# Altium PCB MEA_60_6MIL.PcbDoc
Units mil, origin at the board's own origin, x right, y up, seen from the top; angles counter-clockwise.
Board outline 1929.13 x 1929.13 mil, 4 copper layers (Top Copper Layer, Internal Copper Layer 1, Internal Copper Layer 2, Bottom Copper Layer), stack 62.205 mil thick; 1 components, 60 nets, 120 pads, 13 vias.
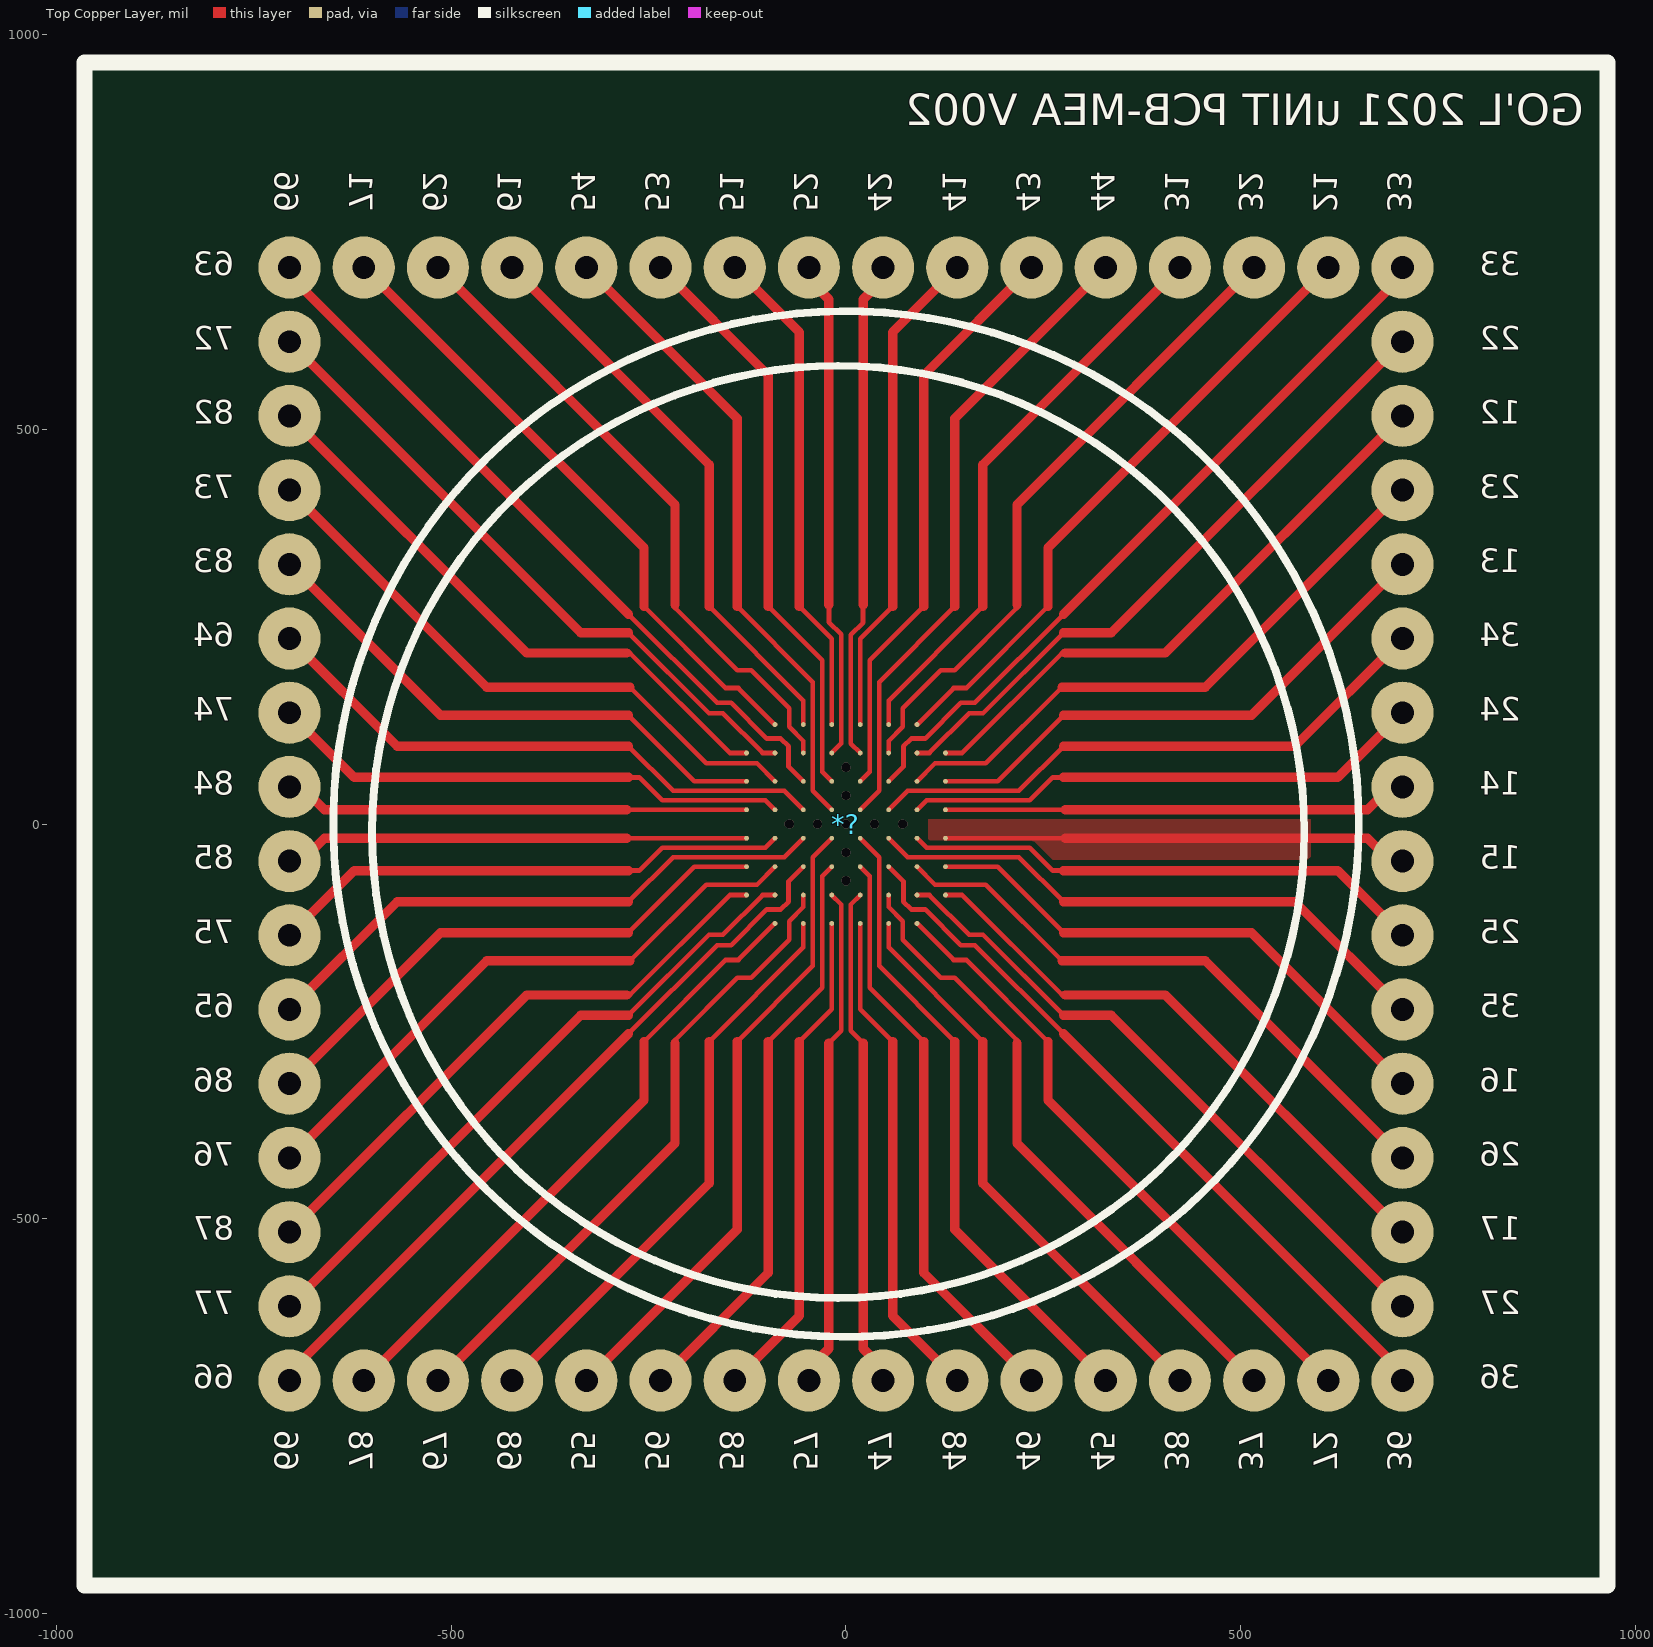
[diagram p0: Top Copper Layer view]
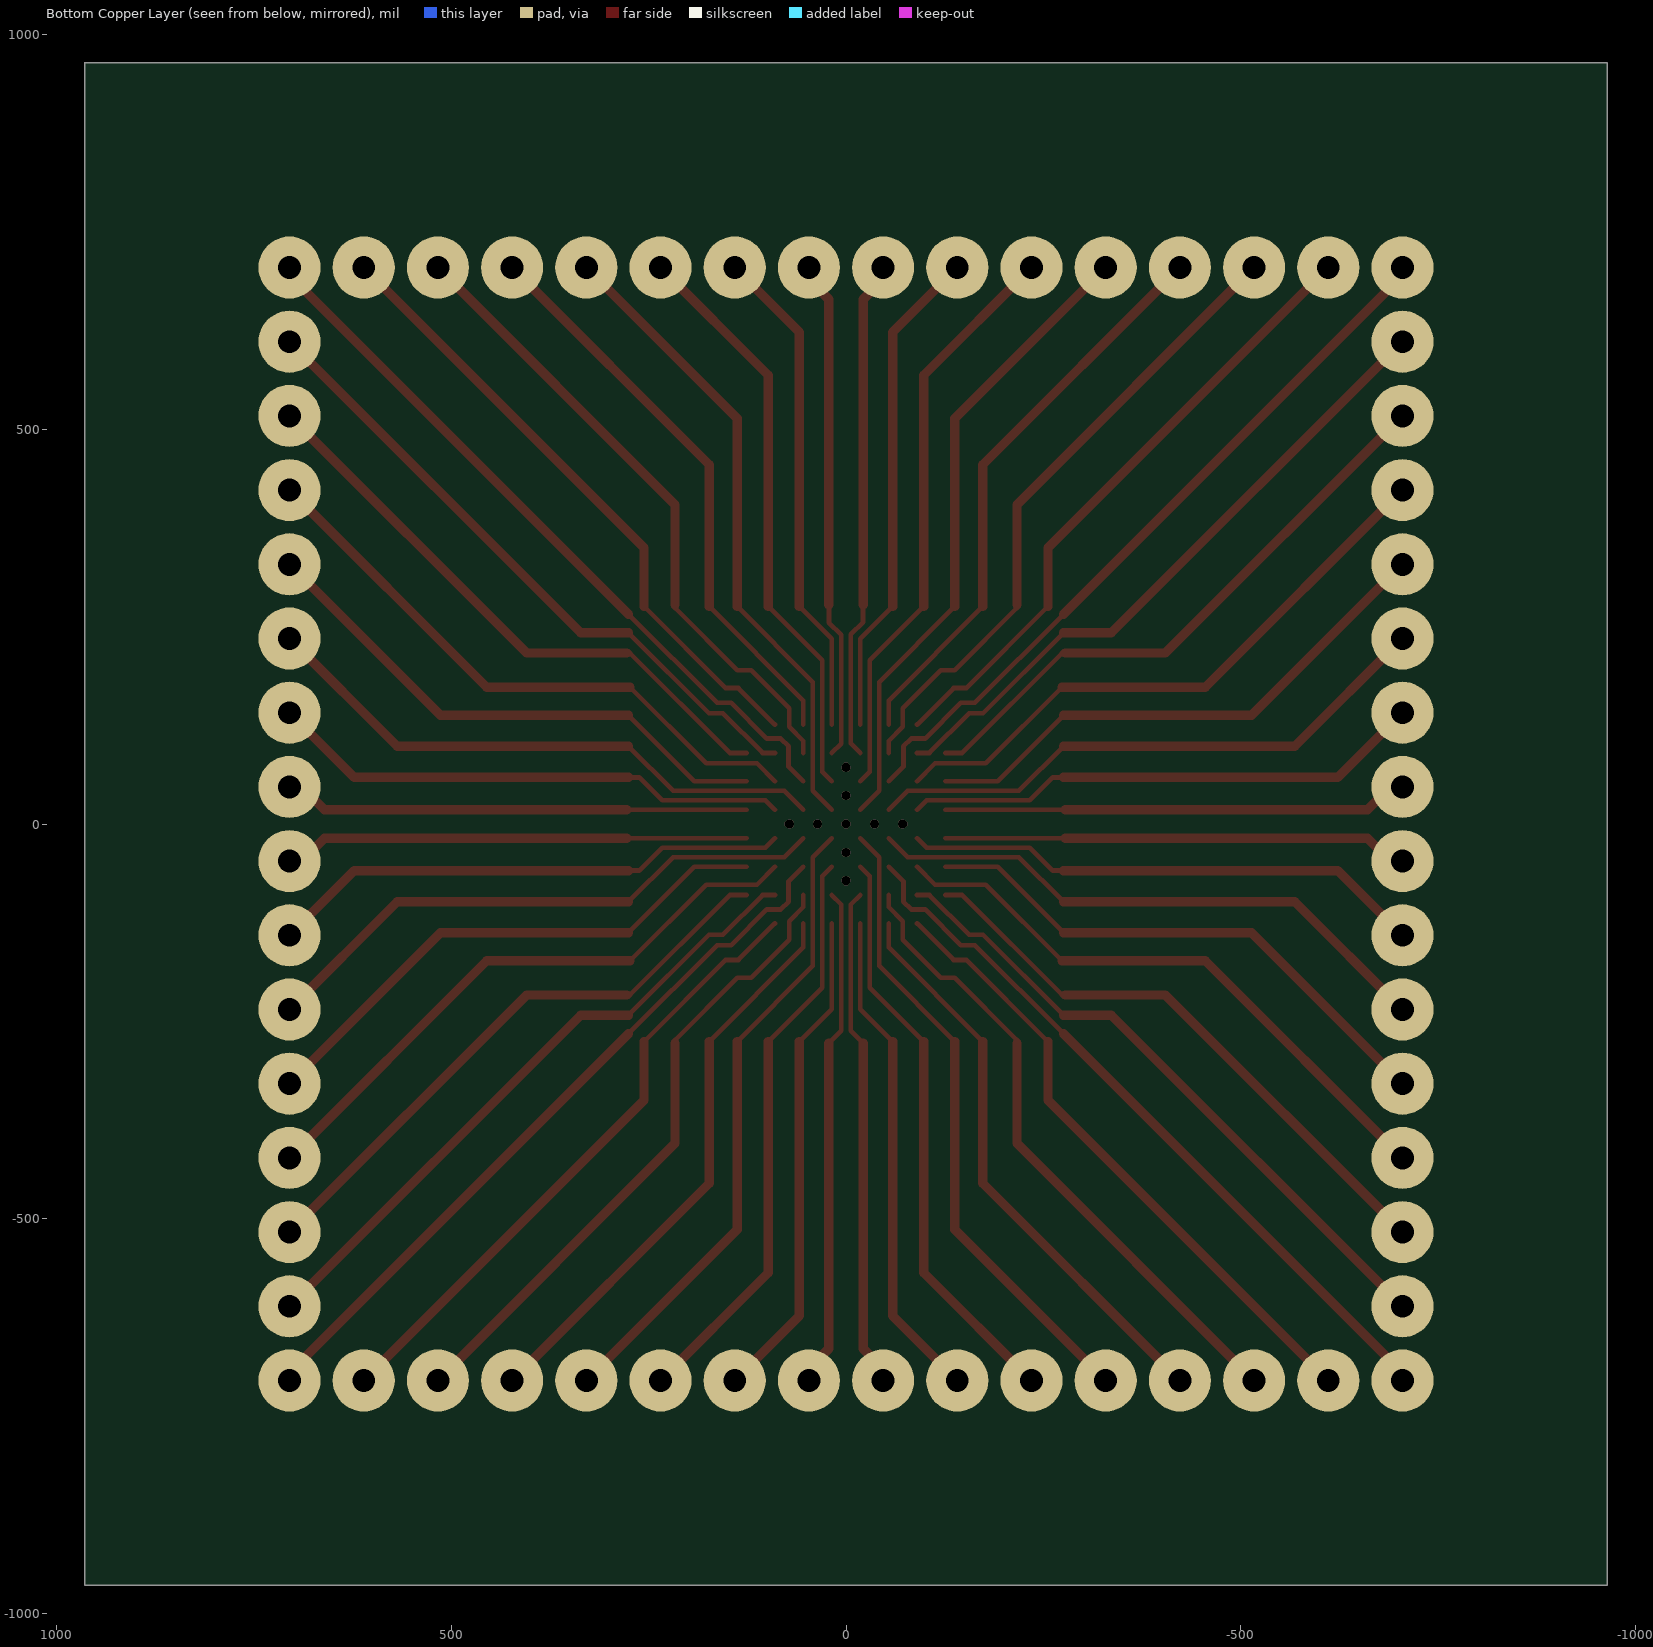
[diagram p1: Bottom Copper Layer view, seen from below]

## Layer stack, top to bottom
Top Solder: solder mask 0.3937, Solder Resist, Dk 3.5
Top Copper Layer: signal copper 1.378
Dielectric 1: prepreg 8.6614, FR-4, Dk 4.2
Internal Copper Layer 1: signal copper 1.378
Dielectric 2: core 39.3701, FR-4, Dk 4.2
Internal Copper Layer 2: signal copper 1.378
Dielectric 3: prepreg 8.6614, FR-4, Dk 4.2
Bottom Copper Layer: signal copper 1.378
Bottom Solder: solder mask 0.3937, Solder Resist, Dk 3.5

## Board outline
964.57,-964.57 -964.57,-964.57 -964.57,964.57 964.57,964.57

## Design rules (kind name [scope] priority, off if disabled: settings)
BoardOutlineClearance [All] p1: gap=15.75 ignorepadtopadclearanceinfootprint=FALSE
Clearance [All] p1: gap=6 ignorepadtopadclearanceinfootprint=TRUE
ComponentClearance [All] p1: gap=5.91 collisioncheckmode=3 verticalgap=5.91 showdistances=FALSE
HoleSize [All] p1: absolutevalues=TRUE maxlimit=15.75 minlimit=9.84 maxpercent=80.000 minpercent=20.000
HoleToHoleClearance [All] p1: gap=17.72 allowstackedmicrovias=TRUE
MinimumAnnularRing [All] p1: minimumring=5.91
MinimumSolderMaskSliver [All] p1: minsoldermaskwidth=5.91
PlaneClearance [All] p1: clearance=5.91
PlaneConnect [All] p1: planeconnectstyle=Relief reliefexpansion=9.84 reliefentries=4 reliefconductorwidth=5.91 reliefairgap=5.91
PolygonConnect [All] p1: connectstyle=Direct reliefconductorwidth=5.91 reliefentries=4 polygonreliefangle="90 Angle" airgapwidth=5.91
RoomDefinition MEA_60_6MIL [InComponentClass('MEA_60_6MIL')] p1 off: confinementstyle=ConfineIn formatcopy=TRUE lockcomponents=FALSE outline -964.57,-964.57 1035.43,-964.57 1035.43,35.43 -964.57,35.43
RoutingVias [All] p1: holewidth=9.84 width=21.65 viastyle="Through Hole" minholewidth=9.84 minwidth=21.65 maxholewidth=15.75 maxwidth=31.5
SilkToSilkClearance [All] p1: silktosilkclearance=7.87
SilkToSolderMaskClearance [IsPad] p1: minsilkscreentomaskgap=7.87 clearancetoexposedcopper=TRUE
SolderMaskExpansion [All] p1: expansion=5.91 istentingtop=FALSE
Width [All] p1: maxlimit=1968.5 minlimit=5.91 preferedwidth=8
22 further rules are at their usual default settings.

## Components (designator, comment, footprint, x,y, rotation, side; value= is the part's Value field where it differs from the comment)
*? "POGO_PINS" MEA_6MIL_64 0,0 r180 top locked

## Footprints (in the part's own frame and the unit in brackets; to place one, negate y for a bottom-side part, rotate by r counter-clockwise, add the part's x,y. Pads: shape width x height; smd on the part's side, far side on the other; paste and mask are expansions set on the pad)
MEA_6MIL_64 [mil]
  round 78.74 hole 29 mask+5.91: 12(-705,-517) 13(-705,-329) 14(-705,-47) 15(-705,47) 16(-705,329) 17(-705,517) 21(-611,-705) 22(-705,-611) 23(-705,-423) 24(-705,-141) 25(-705,141) 26(-705,423) 27(-705,611) 28(-611,705) 31(-423,-705) 32(-517,-705) 33(-705,-705) 34(-705,-235) 35(-705,235) 36(-705,705) 37(-517,705) 38(-423,705) 41(-141,-705) 42(-47,-705) 43(-235,-705) 44(-329,-705) 45(-329,705) 46(-235,705) 47(-47,705) 48(-141,705) 51(141,-705) 52(47,-705) 53(235,-705) 54(329,-705) 55(329,705) 56(235,705) 57(47,705) 58(141,705) 61(423,-705) 62(517,-705) 63(705,-705) 64(705,-235) 65(705,235) 66(705,705) 67(517,705) 68(423,705) 71(611,-705) 72(705,-611) 73(705,-423) 74(705,-141) 75(705,141) 76(705,423) 77(705,611) 78(611,705) 82(705,-517) 83(705,-329) 84(705,-47) 85(705,47) 86(705,329) 87(705,517)
  round 6 smd mask+0: 12(-126,-90) 13(-126,-54) 14(-126,-18) 15(-126,18) 16(-126,54) 17(-126,90) 21(-90,-126) 22(-90,-90) 23(-90,-54) 24(-90,-18) 25(-90,18) 26(-90,54) 27(-90,90) 28(-90,126) 31(-54,-126) 32(-54,-90) 33(-54,-54) 34(-54,-18) 35(-54,18) 36(-54,54) 37(-54,90) 38(-54,126) 41(-18,-126) 42(-18,-90) 43(-18,-54) 44(-18,-18) 45(-18,18) 46(-18,54) 47(-18,90) 48(-18,126) 51(18,-126) 52(18,-90) 53(18,-54) 54(18,-18) 55(18,18) 56(18,54) 57(18,90) 58(18,126) 61(54,-126) 62(54,-90) 63(54,-54) 64(54,-18) 65(54,18) 66(54,54) 67(54,90) 68(54,126) 71(90,-126) 72(90,-90) 73(90,-54) 74(90,-18) 75(90,18) 76(90,54) 77(90,90) 78(90,126) 82(126,-90) 83(126,-54) 84(126,-18) 85(126,18) 86(126,54) 87(126,90)
  silkscreen extent -965,-965 965,965

## Via types
v1: diameter 11.81, hole 11.81, Top Copper Layer to Bottom Copper Layer, 13 vias

## Nets (pads, with @x,y where several pads share a name; then routed paths per layer and width w, separated by ;. In a path a pad name is that pad's centre, name@x,y a point inside that pad or via, vN(x,y) a via of type N, cw(c..) or ccw(c..) an arc to the next point about the centre after c; other vN are vias at no path point)
E0: *?.72 | length 830.8
  Top Copper Layer w5.91: -275.59,242.13 -173.6,140.13 -155.88,140.13 -105.75,90 *?.72@-90,90
  Top Copper Layer w11.81: *?.72@-705,611 -336.13,242.13 -275.59,242.13
E1: *?.82 | length 755.9
  Top Copper Layer w5.91: -277.56,216.54 -273.62,216.54 -147.09,90 *?.82@-126,90
  Top Copper Layer w11.81: *?.82@-705,517 -404.54,216.54 -277.56,216.54
E2: *?.73 | length 767.8
  Top Copper Layer w5.91: -273.62,173.23 -177.17,76.77 -112.77,76.77 *?.73@-90,54
  Top Copper Layer w11.81: *?.73@-705,423 -455.23,173.23 -273.62,173.23
E3: *?.83 | length 692.9
  Top Copper Layer w6: -275.59,137.8 -192.04,54.07 *?.83@-126,54
  Top Copper Layer w11.81: *?.83@-705,329 -513.8,137.8 -275.59,137.8
E4: *?.64 | length 740.9
  Top Copper Layer w6: -275.59,98.43 -219.17,42 -78,42 *?.64@-54,18
  Top Copper Layer w11.81: *?.64@-705,235 -568.43,98.43 -275.59,98.43
E5: *?.74 | length 665.9
  Top Copper Layer w6: -275.59,59.06 -261.81,59.06 -232.76,30 -102,30 *?.74@-90,18
  Top Copper Layer w11.81: *?.74@-705,141 -623.06,59.06 -275.59,59.06
E6: *?.84 | length 591.1
  Top Copper Layer w6: -277.8,17.95 -126.05,17.95 *?.84@-126,18
  Top Copper Layer w11.81: *?.84@-689.8,47 -660.76,17.95 -277.8,17.95
  Top Copper Layer w17.72: *?.84@-705,47 *?.84@-689.8,47
E7: *?.85 | length 591.1
  Top Copper Layer w6: -277.8,-17.95 -126.05,-17.95 *?.85@-126,-18
  Top Copper Layer w11.81: *?.85@-689.8,-47 -660.76,-17.95 -277.8,-17.95
  Top Copper Layer w17.72: *?.85@-705,-47 *?.85@-689.8,-47
E8: *?.75 | length 665.9
  Top Copper Layer w6: -275.59,-59.06 -261.81,-59.06 -232.76,-30 -102,-30 *?.75@-90,-18
  Top Copper Layer w11.81: *?.75@-705,-141 -623.06,-59.06 -275.59,-59.06
E9: *?.65 | length 740.9
  Top Copper Layer w6: -275.59,-98.43 -219.17,-42 -78,-42 *?.65@-54,-18
  Top Copper Layer w11.81: *?.65@-705,-235 -568.43,-98.43 -275.59,-98.43
E10: *?.86 | length 692.9
  Top Copper Layer w6: -275.59,-137.8 -192.04,-54.07 *?.86@-126,-54
  Top Copper Layer w11.81: *?.86@-705,-329 -513.8,-137.8 -275.59,-137.8
E11: *?.76 | length 767.8
  Top Copper Layer w5.91: -273.62,-173.23 -177.17,-76.77 -112.77,-76.77 *?.76@-90,-54
  Top Copper Layer w11.81: *?.76@-705,-423 -455.23,-173.23 -273.62,-173.23
E12: *?.87 | length 755.9
  Top Copper Layer w5.91: -277.56,-216.54 -273.62,-216.54 -147.09,-90 *?.87@-126,-90
  Top Copper Layer w11.81: *?.87@-705,-517 -404.54,-216.54 -277.56,-216.54
E13: *?.77 | length 830.8
  Top Copper Layer w5.91: -275.59,-242.13 -173.6,-140.13 -155.88,-140.13 -105.75,-90 *?.77@-90,-90
  Top Copper Layer w11.81: *?.77@-705,-611 -336.13,-242.13 -275.59,-242.13
E14: *?.66 | length 977.9
  Top Copper Layer w6: -275.59,-265.75 -163.39,-153.54 -145.67,-153.54 -100.39,-108.27 -82.68,-108.27 -72.83,-98.43 -72.83,-72.83 ; -72.83,-72.83 -54,-54 -72.83,-72.83
  Top Copper Layer w11.81: *?.66@-695.16,-705 -705,-705 -705,-695.16 -275.59,-265.75
E15: *?.78 | length 804.4
  Top Copper Layer w5.91: -255.91,-275.59 -152.56,-172.24 -136.24,-172.24 *?.78@-90,-126
  Top Copper Layer w11.81: *?.78@-611,-705 -255.91,-349.91 -255.91,-275.59
E16: *?.67 | length 817.2
  Top Copper Layer w5.91: -216.54,-277.56 -216.54,-273.62 -137.8,-194.88 -120.08,-194.88 -72,-146.8 -72,-123.18 -54,-105.18 *?.67@-54,-90
  Top Copper Layer w11.81: *?.67@-517,-705 -216.54,-404.54 -216.54,-277.56
E17: *?.68 | length 731.8
  Top Copper Layer w5.91: -173.23,-275.59 -54,-156.36 *?.68@-54,-126
  Top Copper Layer w11.81: *?.68@-423,-705 -173.23,-455.23 -173.23,-275.59
E18: *?.55 | length 815.8
  Top Copper Layer w6: -137.8,-275.59 -42,-179.8 -42,-42 *?.55@-18,-18
  Top Copper Layer w11.81: *?.55@-329,-705 -137.8,-513.8 -137.8,-275.59
E19: *?.56 | length 740.9
  Top Copper Layer w6: -98.43,-275.59 -30,-207.17 -30,-66 *?.56@-18,-54
  Top Copper Layer w11.81: *?.56@-235,-705 -98.43,-568.43 -98.43,-275.59
E20: *?.58 | length 629.9
  Top Copper Layer w6: -59.06,-275.59 -18,-234.54 *?.58@-18,-126
  Top Copper Layer w11.81: *?.58@-141,-705 -59.06,-623.06 -59.06,-275.59
E21: *?.57 | length 637
  Top Copper Layer w5.91: *?.57@-18,-90 -6,-102
  Top Copper Layer w6: -21.65,-277.56 -6,-261.91 -6,-102
  Top Copper Layer w11.81: *?.57@-47,-689.8 -21.65,-664.46 -21.65,-277.56
  Top Copper Layer w17.72: *?.57@-47,-705 *?.57@-47,-689.8
E22: *?.47 | length 637
  Top Copper Layer w5.91: 6,-102.36 6,-102 *?.47@18,-90
  Top Copper Layer w6: 6,-102.36 6,-261.91 21.65,-277.56
  Top Copper Layer w11.81: 21.65,-277.56 21.65,-664.46 *?.47@47,-689.8
  Top Copper Layer w17.72: *?.47@47,-705 *?.47@47,-689.8
E23: *?.48 | length 629.9
  Top Copper Layer w6: *?.48@18,-126 18,-234.54 59.06,-275.59
  Top Copper Layer w11.81: 59.06,-275.59 59.06,-623.06 *?.48@141,-705
E24: *?.46 | length 740.9
  Top Copper Layer w6: *?.46@18,-54 30,-66 30,-207.17 98.43,-275.59
  Top Copper Layer w11.81: 98.43,-275.59 98.43,-568.43 *?.46@235,-705
E25: *?.45 | length 815.8
  Top Copper Layer w6: *?.45@18,-18 42,-42 42,-179.8 137.8,-275.59
  Top Copper Layer w11.81: 137.8,-275.59 137.8,-513.8 *?.45@329,-705
E26: *?.38 | length 731.8
  Top Copper Layer w5.91: *?.38@54,-126 54,-156.36 173.23,-275.59
  Top Copper Layer w11.81: 173.23,-275.59 173.23,-455.23 *?.38@423,-705
E27: *?.37 | length 817.2
  Top Copper Layer w5.91: *?.37@54,-90 54,-105.18 72,-123.18 72,-146.8 120.08,-194.88 137.8,-194.88 216.54,-273.62 216.54,-277.56
  Top Copper Layer w11.81: 216.54,-277.56 216.54,-404.54 *?.37@517,-705
E28: *?.28 | length 804.4
  Top Copper Layer w5.91: *?.28@90,-126 136.24,-172.24 152.56,-172.24 255.91,-275.59
  Top Copper Layer w11.81: 255.91,-275.59 255.91,-349.91 *?.28@611,-705
E29: *?.36 | length 977.9
  Top Copper Layer w6: 275.59,-265.75 163.39,-153.54 145.67,-153.54 100.39,-108.27 82.68,-108.27 72.83,-98.43 72.83,-72.83 ; 72.83,-72.83 54,-54 72.83,-72.83
  Top Copper Layer w11.81: 275.59,-265.75 705,-695.16 705,-705 *?.36@695.16,-705
E31: *?.27 | length 830.8
  Top Copper Layer w5.91: *?.27@90,-90 105.75,-90 155.88,-140.13 173.6,-140.13 275.59,-242.13
  Top Copper Layer w11.81: 275.59,-242.13 336.13,-242.13 *?.27@705,-611
E32: *?.17 | length 755.9
  Top Copper Layer w5.91: *?.17@126,-90 147.09,-90 273.62,-216.54 277.56,-216.54
  Top Copper Layer w11.81: 277.56,-216.54 404.54,-216.54 *?.17@705,-517
E33: *?.26 | length 767.8
  Top Copper Layer w5.91: *?.26@90,-54 112.77,-76.77 177.17,-76.77 273.62,-173.23
  Top Copper Layer w11.81: 273.62,-173.23 455.23,-173.23 *?.26@705,-423
E34: *?.16 | length 692.9
  Top Copper Layer w6: *?.16@126,-54 192.04,-54.07 275.59,-137.8
  Top Copper Layer w11.81: 275.59,-137.8 513.8,-137.8 *?.16@705,-329
E35: *?.35 | length 740.9
  Top Copper Layer w6: *?.35@54,-18 78,-42 219.17,-42 275.59,-98.43
  Top Copper Layer w11.81: 275.59,-98.43 568.43,-98.43 *?.35@705,-235
E36: *?.25 | length 665.9
  Top Copper Layer w6: *?.25@90,-18 102,-30 232.76,-30 261.81,-59.06 275.59,-59.06
  Top Copper Layer w11.81: 275.59,-59.06 623.06,-59.06 *?.25@705,-141
E37: *?.15 | length 591.1
  Top Copper Layer w6: *?.15@126,-18 126.05,-17.95 277.8,-17.95
  Top Copper Layer w11.81: 277.8,-17.95 660.76,-17.95 *?.15@689.8,-47
  Top Copper Layer w17.72: *?.15@689.8,-47 *?.15@705,-47
E38: *?.14 | length 591.1
  Top Copper Layer w6: *?.14@126,18 126.05,17.95 277.8,17.95
  Top Copper Layer w11.81: 277.8,17.95 660.76,17.95 *?.14@689.8,47
  Top Copper Layer w17.72: *?.14@689.8,47 *?.14@705,47
E39: *?.24 | length 665.9
  Top Copper Layer w6: *?.24@90,18 102,30 232.76,30 261.81,59.06 275.59,59.06
  Top Copper Layer w11.81: 275.59,59.06 623.06,59.06 *?.24@705,141
E40: *?.34 | length 740.9
  Top Copper Layer w6: *?.34@54,18 78,42 219.17,42 275.59,98.43
  Top Copper Layer w11.81: 275.59,98.43 568.43,98.43 *?.34@705,235
E41: *?.13 | length 692.9
  Top Copper Layer w6: *?.13@126,54 192.04,54.07 275.59,137.8
  Top Copper Layer w11.81: 275.59,137.8 513.8,137.8 *?.13@705,329
E42: *?.23 | length 767.8
  Top Copper Layer w5.91: *?.23@90,54 112.77,76.77 177.17,76.77 273.62,173.23
  Top Copper Layer w11.81: 273.62,173.23 455.23,173.23 *?.23@705,423
E43: *?.12 | length 755.9
  Top Copper Layer w5.91: *?.12@126,90 147.09,90 273.62,216.54 277.56,216.54
  Top Copper Layer w11.81: 277.56,216.54 404.54,216.54 *?.12@705,517
E44: *?.22 | length 830.8
  Top Copper Layer w5.91: *?.22@90,90 105.75,90 155.88,140.13 173.6,140.13 275.59,242.13
  Top Copper Layer w11.81: 275.59,242.13 336.13,242.13 *?.22@705,611
E45: *?.33 | length 977.9
  Top Copper Layer w6: 275.59,265.75 163.39,153.54 145.67,153.54 100.39,108.27 82.68,108.27 72.83,98.43 72.83,72.83 ; 72.83,72.83 54,54 72.83,72.83
  Top Copper Layer w11.81: 275.59,265.75 705,695.16 705,705 *?.33@695.16,705
E46: *?.21 | length 804.4
  Top Copper Layer w5.91: *?.21@90,126 136.24,172.24 152.56,172.24 255.91,275.59
  Top Copper Layer w11.81: 255.91,275.59 255.91,349.91 *?.21@611,705
E47: *?.32 | length 817.2
  Top Copper Layer w5.91: *?.32@54,90 54,105.18 72,123.18 72,146.8 120.08,194.88 137.8,194.88 216.54,273.62 216.54,277.56
  Top Copper Layer w11.81: 216.54,277.56 216.54,404.54 *?.32@517,705
E48: *?.31 | length 731.8
  Top Copper Layer w5.91: *?.31@54,126 54,156.36 173.23,275.59
  Top Copper Layer w11.81: 173.23,275.59 173.23,455.23 *?.31@423,705
E49: *?.44 | length 815.8
  Top Copper Layer w6: *?.44@18,18 42,42 42,179.8 137.8,275.59
  Top Copper Layer w11.81: 137.8,275.59 137.8,513.8 *?.44@329,705
E50: *?.43 | length 740.9
  Top Copper Layer w6: *?.43@18,54 30,66 30,207.17 98.43,275.59
  Top Copper Layer w11.81: 98.43,275.59 98.43,568.43 *?.43@235,705
E51: *?.41 | length 629.9
  Top Copper Layer w6: *?.41@18,126 18,234.54 59.06,275.59
  Top Copper Layer w11.81: 59.06,275.59 59.06,623.06 *?.41@141,705
E52: *?.42 | length 637
  Top Copper Layer w5.91: 6.09,102.36 6.09,101.91 *?.42@18,90
  Top Copper Layer w6: 6.09,102.36 6.09,120.94 6,121.03 6,239.51 21.65,255.16 21.65,277.56
  Top Copper Layer w11.81: 21.65,277.56 21.65,664.46 *?.42@47,689.8
  Top Copper Layer w17.72: *?.42@47,689.8 *?.42@47,705
E53: *?.52 | length 637.7
  Top Copper Layer w5.91: *?.52@-18,90 -5.91,102.09
  Top Copper Layer w6: -21.65,278.21 -21.65,255.91 -6,240.25 -6,116.06 -5.91,115.96 -5.91,102.09
  Top Copper Layer w11.81: *?.52@-47,689.8 -21.65,664.46 -21.65,277.56
  Top Copper Layer w17.72: *?.52@-47,689.8 *?.52@-47,705
E54: *?.51 | length 629.9
  Top Copper Layer w6: -59.06,275.59 -18,234.54 *?.51@-18,126
  Top Copper Layer w11.81: *?.51@-141,705 -59.06,623.06 -59.06,275.59
E55: *?.53 | length 740.9
  Top Copper Layer w6: -98.43,275.59 -30,207.17 -30,66 *?.53@-18,54
  Top Copper Layer w11.81: *?.53@-235,705 -98.43,568.43 -98.43,275.59
E56: *?.54 | length 815.8
  Top Copper Layer w6: -137.8,275.59 -42,179.8 -42,42 *?.54@-18,18
  Top Copper Layer w11.81: *?.54@-329,705 -137.8,513.8 -137.8,275.59
E57: *?.61 | length 731.8
  Top Copper Layer w5.91: -173.23,275.59 -54,156.36 *?.61@-54,126
  Top Copper Layer w11.81: *?.61@-423,705 -173.23,455.23 -173.23,275.59
E58: *?.62 | length 817.2
  Top Copper Layer w5.91: -216.54,277.56 -216.54,273.62 -137.8,194.88 -120.08,194.88 -72,146.8 -72,123.18 -54,105.18 *?.62@-54,90
  Top Copper Layer w11.81: *?.62@-517,705 -216.54,404.54 -216.54,277.56
E59: *?.71 | length 804.4
  Top Copper Layer w5.91: -255.91,275.59 -152.56,172.24 -136.24,172.24 *?.71@-90,126
  Top Copper Layer w11.81: *?.71@-611,705 -255.91,349.91 -255.91,275.59
E60: *?.63 | length 977.9
  Top Copper Layer w6: -275.59,265.75 -163.39,153.54 -145.67,153.54 -100.39,108.27 -82.68,108.27 -72.83,98.43 -72.83,72.83 ; -72.83,72.83 -54,54 -72.83,72.83
  Top Copper Layer w11.81: *?.63@-695.16,705 -705,705 -705,695.16 -275.59,265.75
copper on no net:
  other v1: 0,-72 0,-36 0,-36 -72,0 -36,0 -36,0 0,0 36,0 36,0 72,0 0,36 0,36 0,72

## Polygon pours and split planes (outlines as drawn)
E37 on Top Solder "E37_L01_P001" (solid, pour order 1): 588.58,-43.31 588.58,3.94 104.33,3.94 104.33,-21.65 242.13,-21.65 263.78,-43.31
E37 on Top Copper Layer "E37_L01_P002" (solid, remove dead copper, pour order 2): 584.65,-45.28 588.58,-41.34 588.58,5.91 104.33,5.91 104.33,-21.65 238.19,-21.65 261.81,-45.28

## Silkscreen, mask and mechanical layers (free items; w line width, h text height)
Top Overlay:
  circle w10: c0,0 r649.61
  circle w10: c-10,-10 r590.55
  lines w20: -964.57,-964.57 -964.57,964.57 ; -964.57,-964.57 964.57,-964.57 ; -964.57,-964.57 964.57,-964.57 ; -964.57,-964.57 -964.57,964.57 ; -964.57,964.57 964.57,964.57 ; -964.57,964.57 964.57,964.57 ; 964.57,-964.57 964.57,964.57 ; 964.57,-964.57 964.57,964.57
  text "GO'L 2021 uNIT PCB-MEA V002" at 934.57,885.43 h40

## Text inside footprints (layer, text, board x,y; h text height)
*?: Top Overlay "66" at -723.5,774.85 h30 r270; Top Overlay "71" at -629.5,774.85 h30 r270; Top Overlay "62" at -535.5,774.85 h30 r270; Top Overlay "61" at -441.5,774.85 h30 r270; Top Overlay "54" at -347.5,774.85 h30 r270; Top Overlay "53" at -253.5,774.85 h30 r270; Top Overlay "51" at -159.5,774.85 h30 r270; Top Overlay "52" at -65.5,774.85 h30 r270; Top Overlay "42" at 28.5,774.85 h30 r270; Top Overlay "41" at 122.5,774.84 h30 r270; Top Overlay "43" at 216.5,774.85 h30 r270; Top Overlay "44" at 310.5,774.85 h30 r270; Top Overlay "31" at 404.5,774.84 h30 r270; Top Overlay "32" at 498.5,774.85 h30 r270; Top Overlay "21" at 592.5,774.84 h30 r270; Top Overlay "33" at 686.5,774.85 h30 r270; Top Overlay "66" at -723.5,-820.15 h30 r270; Top Overlay "78" at -629.5,-820.15 h30 r270; Top Overlay "67" at -535.5,-820.15 h30 r270; Top Overlay "68" at -441.5,-820.15 h30 r270; Top Overlay "55" at -347.5,-820.15 h30 r270; Top Overlay "56" at -253.5,-820.15 h30 r270; Top Overlay "58" at -159.5,-820.15 h30 r270; Top Overlay "57" at -65.5,-820.15 h30 r270; Top Overlay "47" at 28.5,-820.15 h30 r270; Top Overlay "48" at 122.5,-820.15 h30 r270; Top Overlay "46" at 216.5,-820.15 h30 r270; Top Overlay "45" at 310.5,-820.15 h30 r270; Top Overlay "38" at 404.5,-820.15 h30 r270; Top Overlay "37" at 498.5,-820.15 h30 r270; Top Overlay "72" at 592.5,-820.15 h30 r270; Top Overlay "36" at 686.5,-820.15 h30 r270; Top Overlay "66" at -775,-715 h30; Top Overlay "77" at -775,-621 h30; Top Overlay "87" at -775,-527 h30; Top Overlay "76" at -775,-433 h30; Top Overlay "86" at -775,-339 h30; Top Overlay "65" at -775,-245 h30; Top Overlay "75" at -775,-151 h30; Top Overlay "85" at -775,-57 h30; Top Overlay "84" at -775,37 h30; Top Overlay "74" at -775,131 h30; Top Overlay "64" at -775,225 h30; Top Overlay "83" at -775,319 h30; Top Overlay "73" at -775,413 h30; Top Overlay "82" at -775,507 h30; Top Overlay "72" at -775,601 h30; Top Overlay "63" at -775,695 h30; Top Overlay "36" at 855,-715 h30; Top Overlay "27" at 855,-621 h30; Top Overlay "17" at 855,-527 h30; Top Overlay "26" at 855,-433 h30; Top Overlay "16" at 855,-339 h30; Top Overlay "35" at 855,-245 h30; Top Overlay "25" at 855,-151 h30; Top Overlay "15" at 855,-57 h30; Top Overlay "14" at 855,37 h30; Top Overlay "24" at 855,131 h30; Top Overlay "34" at 855,225 h30; Top Overlay "13" at 855,319 h30; Top Overlay "23" at 855,413 h30; Top Overlay "12" at 855,507 h30; Top Overlay "22" at 855,601 h30; Top Overlay "33" at 855,695 h30